# Altium PCB Telit-GPS-SL871-Panel-V1.1.PcbDoc
Units mm, origin at the board's own origin, x right, y up, seen from the top; angles counter-clockwise.
Board outline 180 x 205 mm, 2 copper layers (Top Layer, Bottom Layer); 8 components, 0 nets, 8 pads, 0 vias.
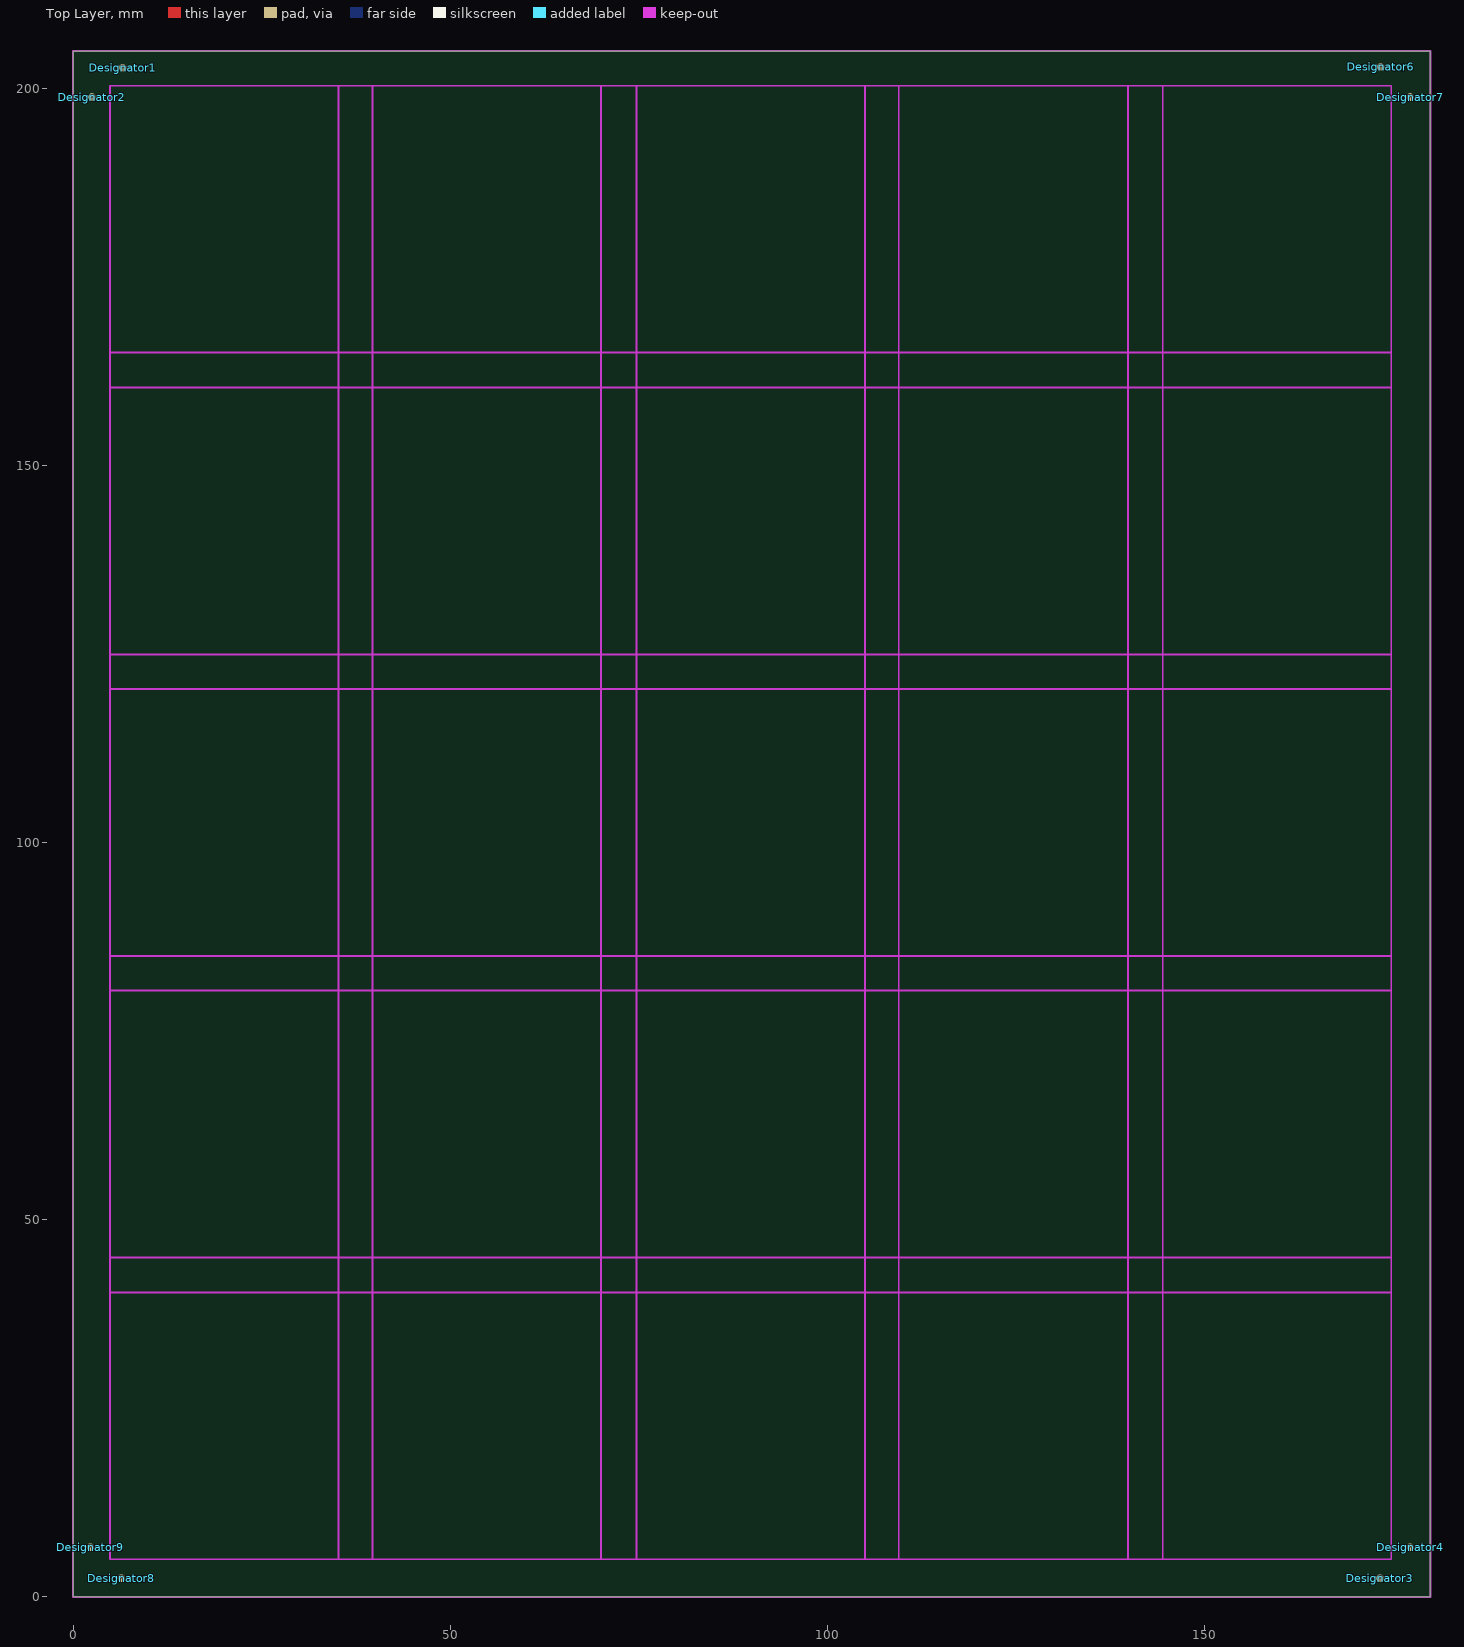
[diagram p0: Top Layer view]
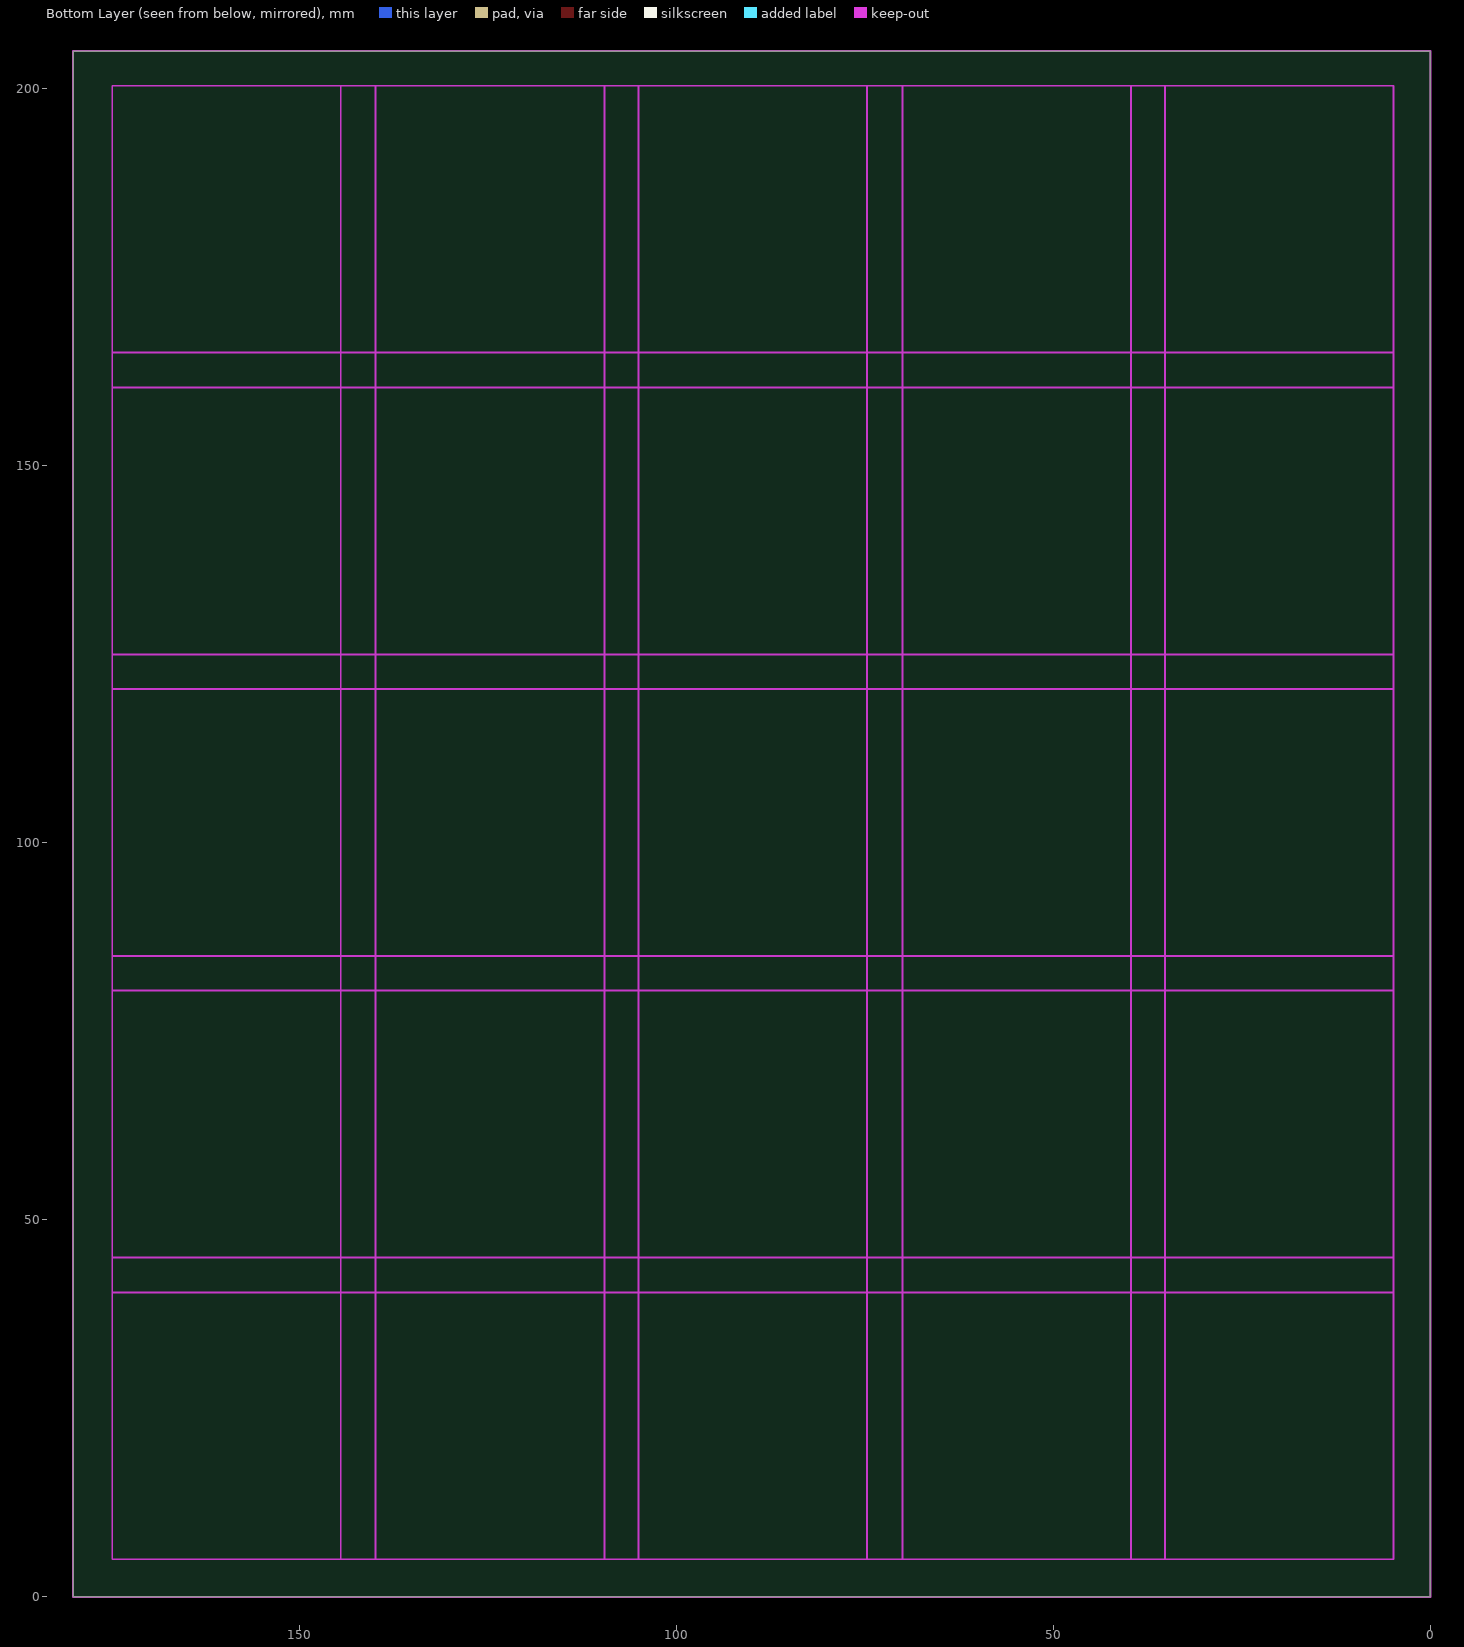
[diagram p1: Bottom Layer view, seen from below]

## Layer stack, top to bottom
Top Solder: solder mask 0.0102, Solder Resist, Dk 3.5
Top Layer: signal copper 0.0356
Dielectric 1: dielectric 0.32, FR-4, Dk 4.8
Bottom Layer: signal copper 0.0356
Bottom Solder: solder mask 0.0102, Solder Resist, Dk 3.5

## Board outline
0,0 180,0 180,205 0,205

## Design rules (kind name [scope] priority, off if disabled: settings)
Clearance [All] p1: gap=0.254 ignorepadtopadclearanceinfootprint=FALSE except(0: Arc-Hole Track-Hole SMDPad-Hole THPad-Hole Via-Hole Fill-Hole Poly-Hole Region-Hole Text-Hole)
PolygonConnect [All] p1: connectstyle=Relief reliefconductorwidth=0.254 reliefentries=4 polygonreliefangle="90 Angle" airgapwidth=0.254
RoutingVias [All] p1: holewidth=0.711 width=1.27 viastyle="Through Hole" minholewidth=0.711 minwidth=1.27 maxholewidth=0.711 maxwidth=1.27
SolderMaskExpansion [All] p1: expansion=0.102
Width [All] p1: maxlimit=0.254 minlimit=0.254 preferedwidth=0.254
30 further rules are at their usual default settings.

## Components (designator, comment, footprint, x,y, rotation, side; value= is the part's Value field where it differs from the comment)
Designator1 "Comment" FID_40K120D 6.6,202.8 r0 top
Designator2 "Comment" FID_40K120D 2.5,198.9 r0 top
Designator3 "Comment" FID_40K120D 173.3,2.5 r0 top
Designator4 "Comment" FID_40K120D 177.3,6.6 r0 top
Designator6 "Comment" FID_40K120D 173.4,202.9 r0 top
Designator7 "Comment" FID_40K120D 177.3,198.9 r0 top
Designator8 "Comment" FID_40K120D 6.4,2.5 r0 top
Designator9 "Comment" FID_40K120D 2.3,6.6 r0 top

## Footprints (in the part's own frame and the unit in brackets; to place one, negate y for a bottom-side part, rotate by r counter-clockwise, add the part's x,y. Pads: shape width x height; smd on the part's side, far side on the other; paste and mask are expansions set on the pad)
FID_40K120D [mil]
  round 40 smd paste-40 mask+40: 1(0,0)

## Nets (pads, with @x,y where several pads share a name; then routed paths per layer and width w, separated by ;. In a path a pad name is that pad's centre, name@x,y a point inside that pad or via, vN(x,y) a via of type N, cw(c..) or ccw(c..) an arc to the next point about the centre after c; other vN are vias at no path point)
pads on no net: Designator1.1 Designator2.1 Designator3.1 Designator4.1 Designator6.1 Designator7.1 Designator8.1 Designator9.1

## Keep-outs
Keep-Out Layer:
  lines w0.254: 5,40.4 174.8,40.4 ; 5,45 174.8,45 ; 5,80.4 174.8,80.4 ; 5,85 174.8,85 ; 5,120.4 174.8,120.4 ; 5,125 174.8,125 ; 5,160.4 174.8,160.4 ; 5,165 174.8,165 ; 35.2,5 35.2,200.4 ; 39.7,5 39.7,200.4 ; 70,5 70,200.4 ; 74.7,5 74.7,200.4 ; 105,5 105,200.4 ; 109.5,5 109.5,200.4 ; 139.9,5 139.9,200.4 ; 144.5,5 144.5,200.4 ; 0,0 0,205 180,205 180,0 0,0 ; 4.9,5 4.9,200.4 174.8,200.4 174.8,5 4.9,5

## Dimensions
0,205 to 180,205 on Mechanical 1
180,205 to 180,0 on Mechanical 1
174.8,5 to 174.8,40.4 on Mechanical 1
174.8,5 to 174.8,45 on Mechanical 1
0,205 to 35.2,200.4 on Mechanical 1
4.9,200.4 to 35.2,200.4 on Mechanical 1
0,222.4 to 39.7,200.4 on Mechanical 1
180,0 to 174.8,45 on Mechanical 1

## Panel: embedded boards
"Telit-GPS-SL871-Module-V1.1.PcbDoc" at 5.067,5.194, 5 rows x 5 columns, spacing 40 x 34.9, rotation 0